# EAGLE board imu (EAGLE 9.6.2)
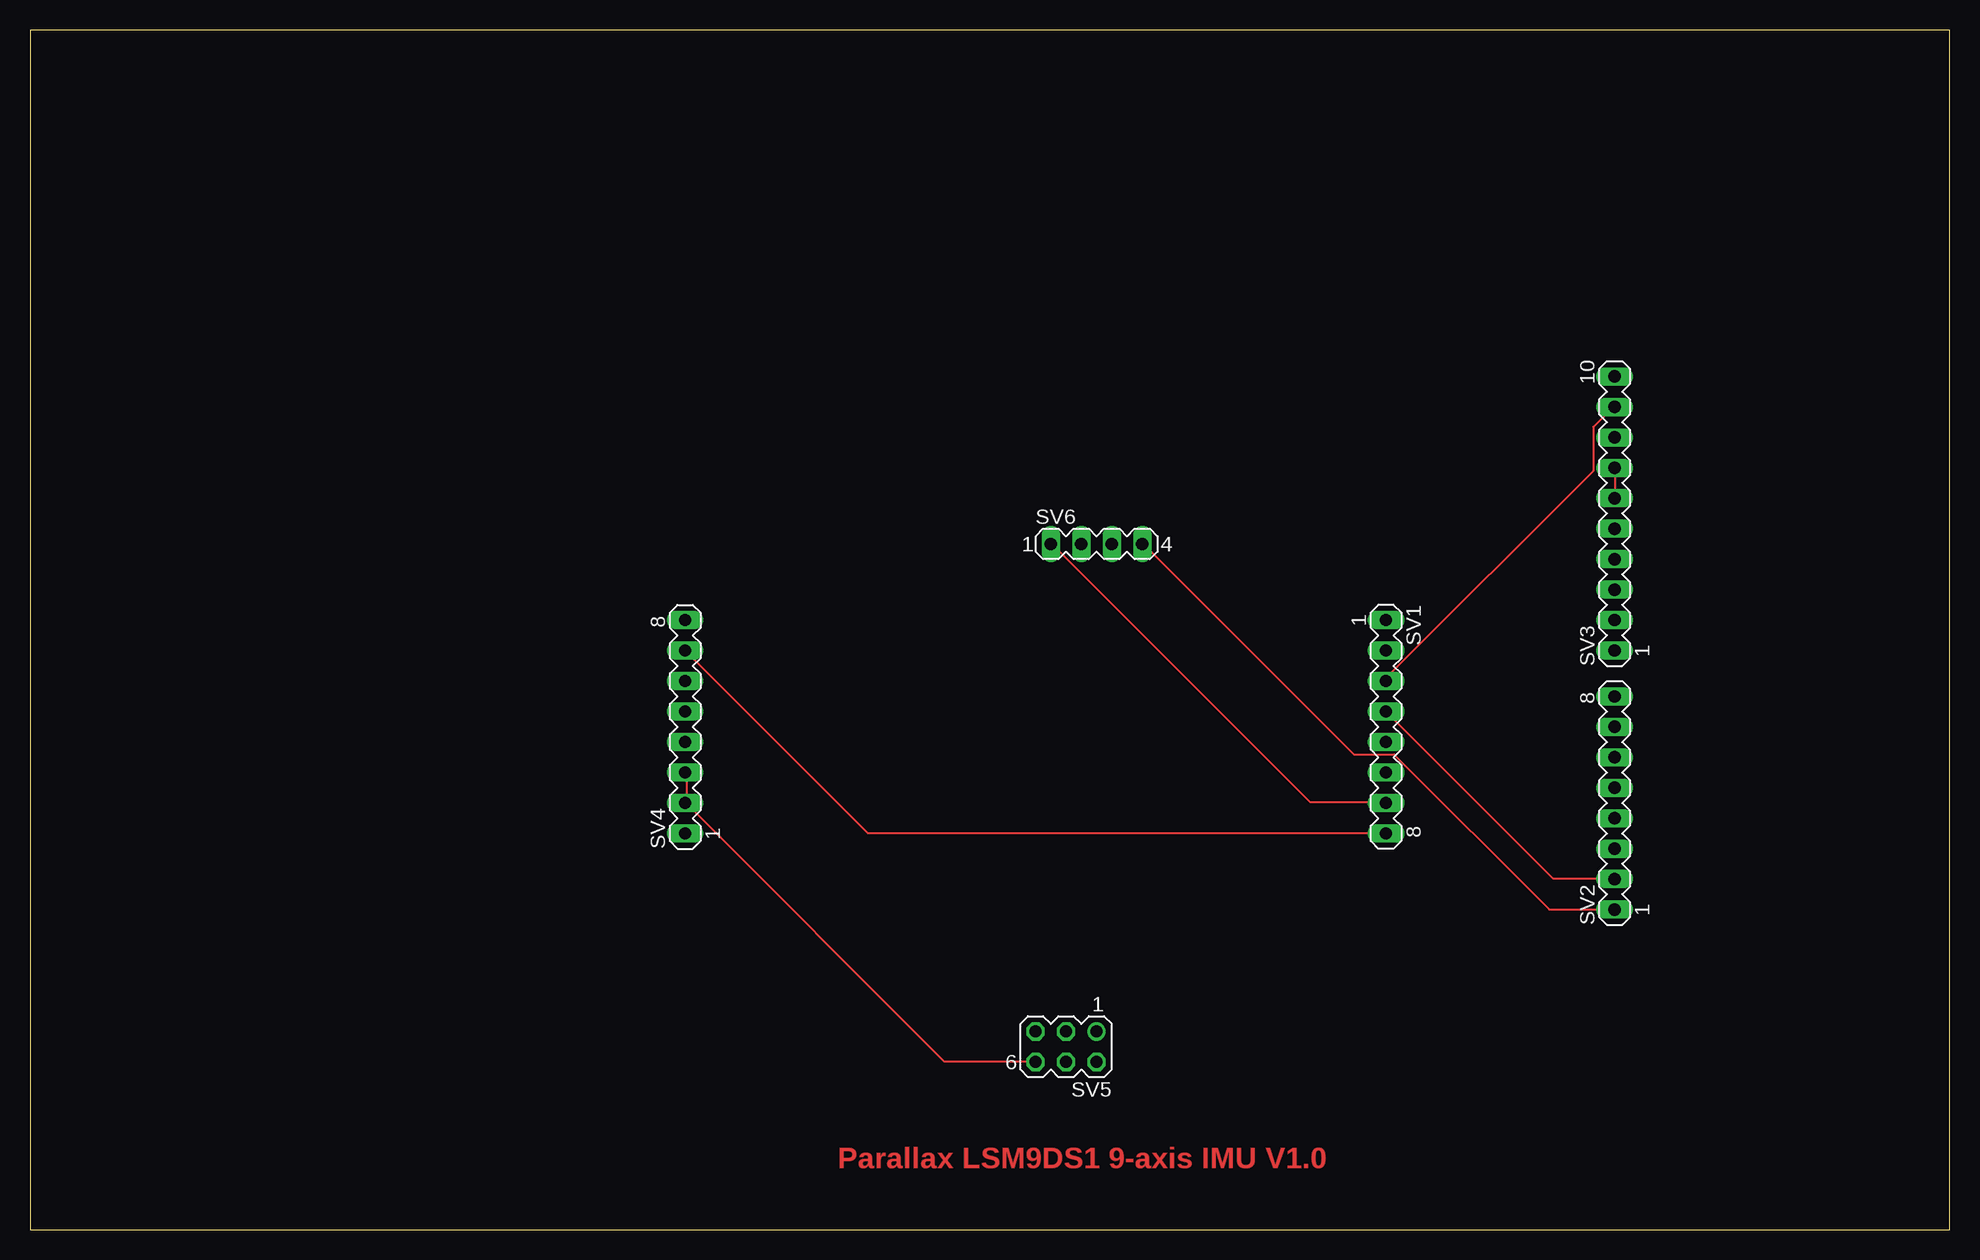
[diagram p0: board, top side]
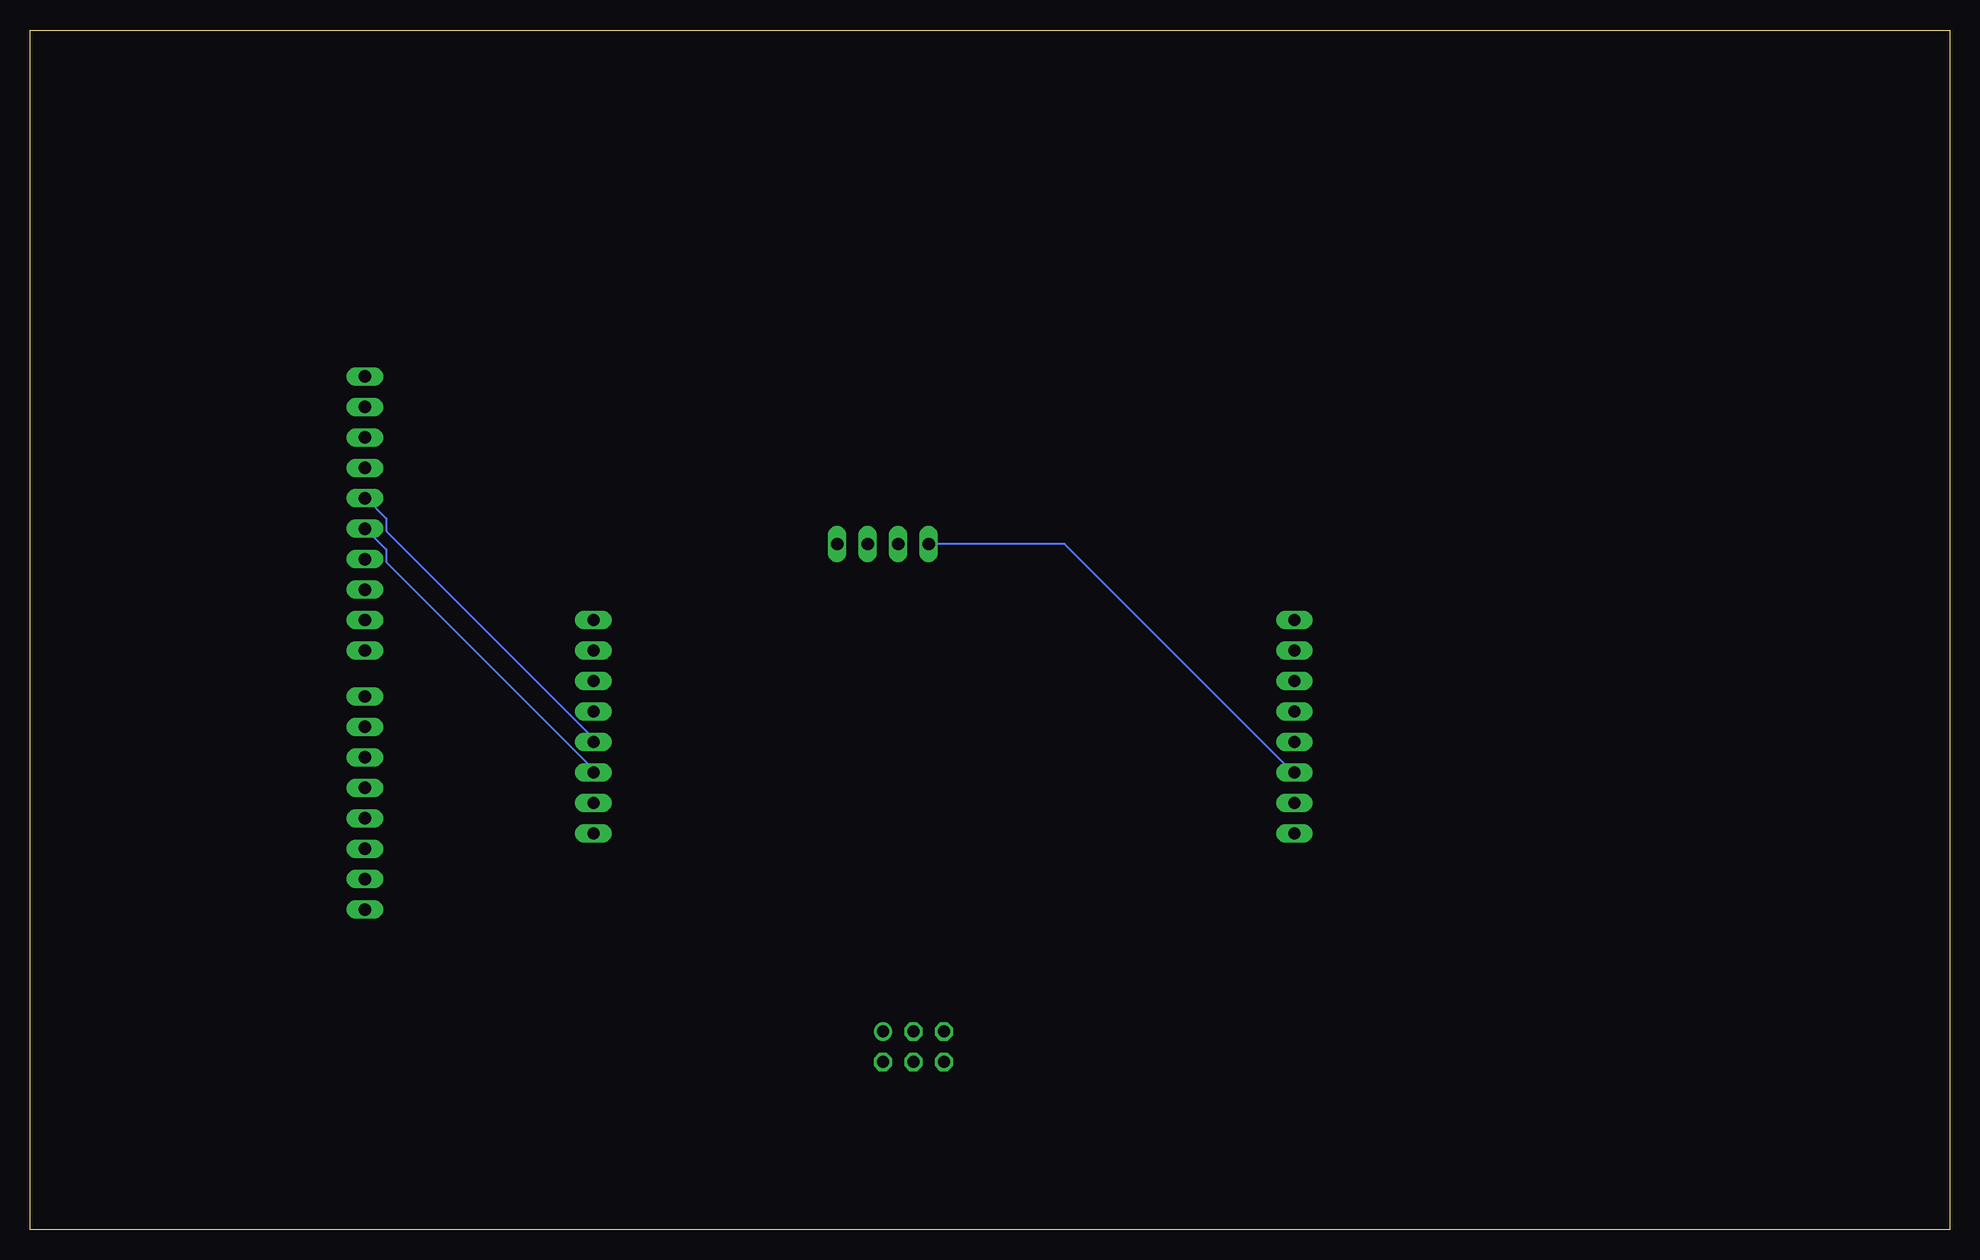
[diagram p1: board, bottom side, seen from below]

Size 160 x 100 mm. Coordinates in mm from the lower left corner, seen from the top.
Outline: 0,0 160,0 160,100 0,100 0,0
Copper layers (1*16): Top 0.035mm / dielectric 1.5mm / Bottom 0.035mm
Design rules "default": minimum track width 6mil, minimum drill 0.35mm, track to track 6mil, track to pad 6mil, pad to pad 6mil, via to via 6mil, smd to smd 6mil, copper to edge 40mil, drill to drill 6mil, minimum pad ring 10mil, minimum via ring 8mil, stop-mask expansion 4mil, vias tented up to drill 0mil, thermal gap 10mil

## Footprints (pad centres in the part's own frame; a part is rotated, then mirrored left to right if it is on the bottom)
MA08-1 = drill 1.016 long: 1 -8.89,0; 2 -6.35,0; 3 -3.81,0; 4 -1.27,0; 5 1.27,0; 6 3.81,0; 7 6.35,0; 8 8.89,0
MA10-1 = drill 1.016 long: 1 -11.43,0; 2 -8.89,0; 3 -6.35,0; 4 -3.81,0; 5 -1.27,0; 6 1.27,0; 7 3.81,0; 8 6.35,0; 9 8.89,0; 10 11.43,0
MA03-2 = drill 1.016: 1 -2.54,-1.27 | drill 1.016 octagon: 2 -2.54,1.27; 3 0,-1.27; 4 0,1.27; 5 2.54,-1.27; 6 2.54,1.27
MA04-1 = drill 1.016 long: 1 -3.81,0; 2 -1.27,0; 3 1.27,0; 4 3.81,0

## Placement (x,y rotation side)
SV1  IMU  [MA08-1]  113.03,41.91 270 top
SV2  j403  [MA08-1]  132.08,35.56 90 top
SV3  j404  [MA10-1]  132.08,59.69 90 top
SV4  j401  [MA08-1]  54.61,41.91 90 top
SV5  J405  [MA03-2]  86.36,15.24 180 top
SV6  DPINS  [MA04-1]  88.9,57.15 0 top

## Library data of the parts
SV1-SV6 = con-lstb; OC_FARNELL: unknown; OC_NEWARK: unknown

## Nets
+3V3: SV1.8 SV4.7
CS_AG: SV1.4 SV2.2
CS_M: SV1.3 SV3.9
GND: SV1.7 SV4.2 SV4.3 SV5.6 SV6.1
N$2: SV2.1 SV6.4
SDIO: SV1.5 SV3.6 SV3.7
SLC: SV1.6 SV3.5

## Tracks (layer width: path | path; a pad name or v marks a point on that pad's centre or on a via)
+3V3
  Top 0.152: SV4.7 69.8,33.07 112.93,33.07 SV1.8
CS_AG
  Top 0.152: SV1.4 126.95,29.26 131.98,29.26 SV2.2
CS_M
  Top 0.152: SV1.3 113.08,45.72 113.08,46.02 130.3,63.25 130.3,66.9 131.98,68.58 SV3.9
GND
  Top 0.152: SV1.7 112.93,35.66 106.68,35.66 85.19,57.15 SV6.1 | SV4.3 54.71,38.1 54.71,35.66 SV4.2 54.71,35.51 76.2,14.02 83.82,14.02 SV5.6
  Bottom 0.152: SV6.1 73.76,57.15 54.71,38.1 SV4.3
N$2
  Top 0.152: SV2.1 126.64,26.67 113.69,39.62 110.34,39.62 92.81,57.15 SV6.4
SDIO
  Top 0.152: SV3.7 132.13,63.4 132.13,60.96 SV3.6
  Bottom 0.152: SV1.5 113.08,40.69 113.08,41 130.3,58.22 130.3,59.28 131.98,60.96 SV3.6
SLC
  Bottom 0.152: SV1.6 113.08,38.1 113.08,38.41 130.3,55.63 130.3,56.69 131.98,58.37 SV3.5

## Text on the board
Top: Parallax LSM9DS1 9-axis IMU V1.0